# Altium PCB PCB_BTL.PcbDoc
Units mm, origin at the board's own origin, x right, y up, seen from the top; angles counter-clockwise.
Board outline 96.39 x 92.58 mm, 2 copper layers (Top Layer, Bottom Layer); 35 components, 34 nets, 92 pads, 0 vias.
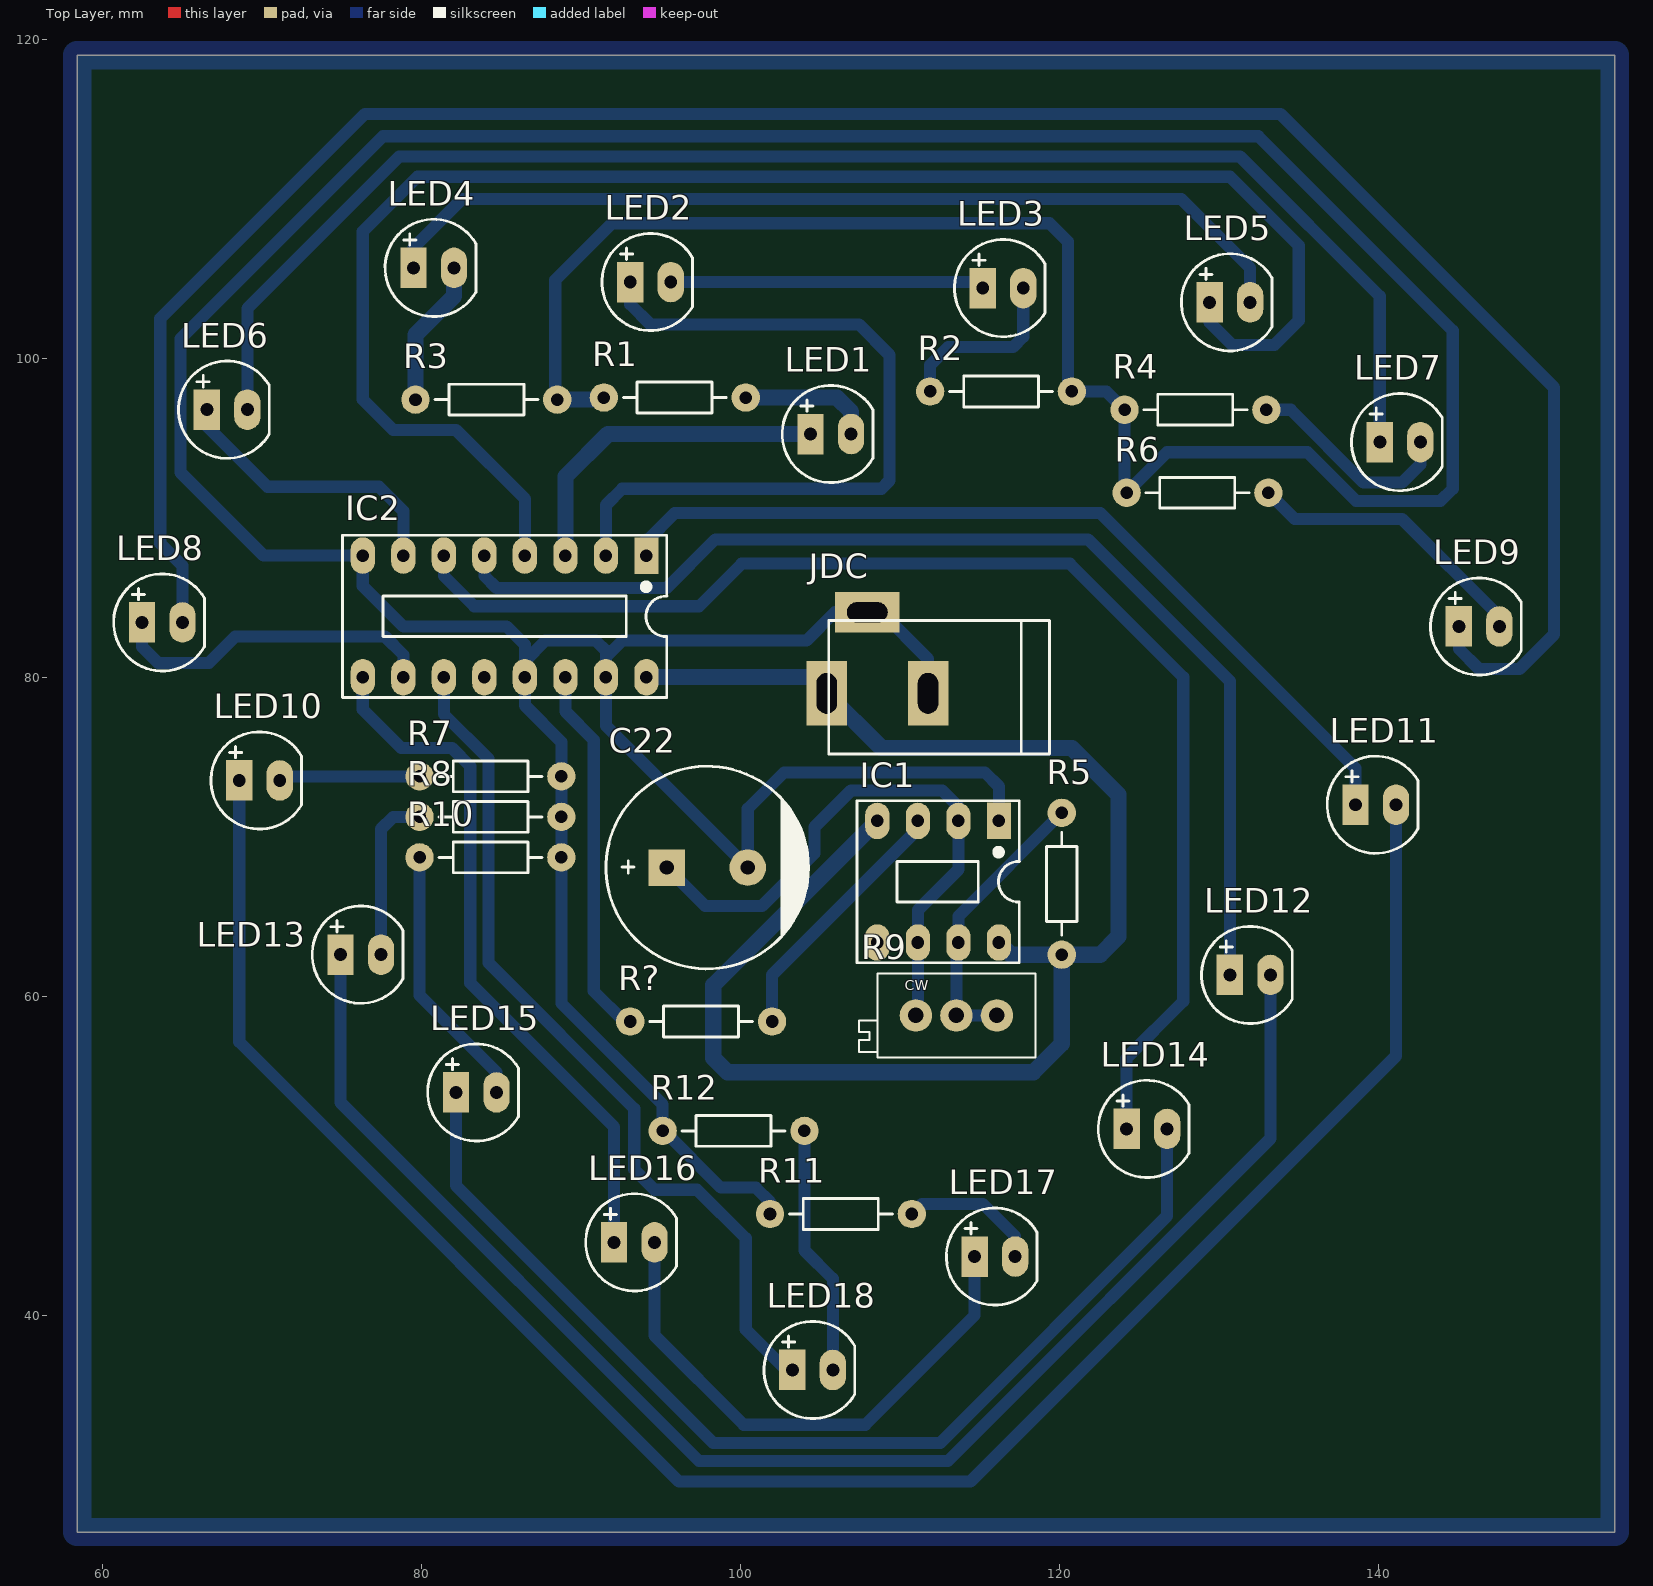
[diagram p0: Top Layer view]
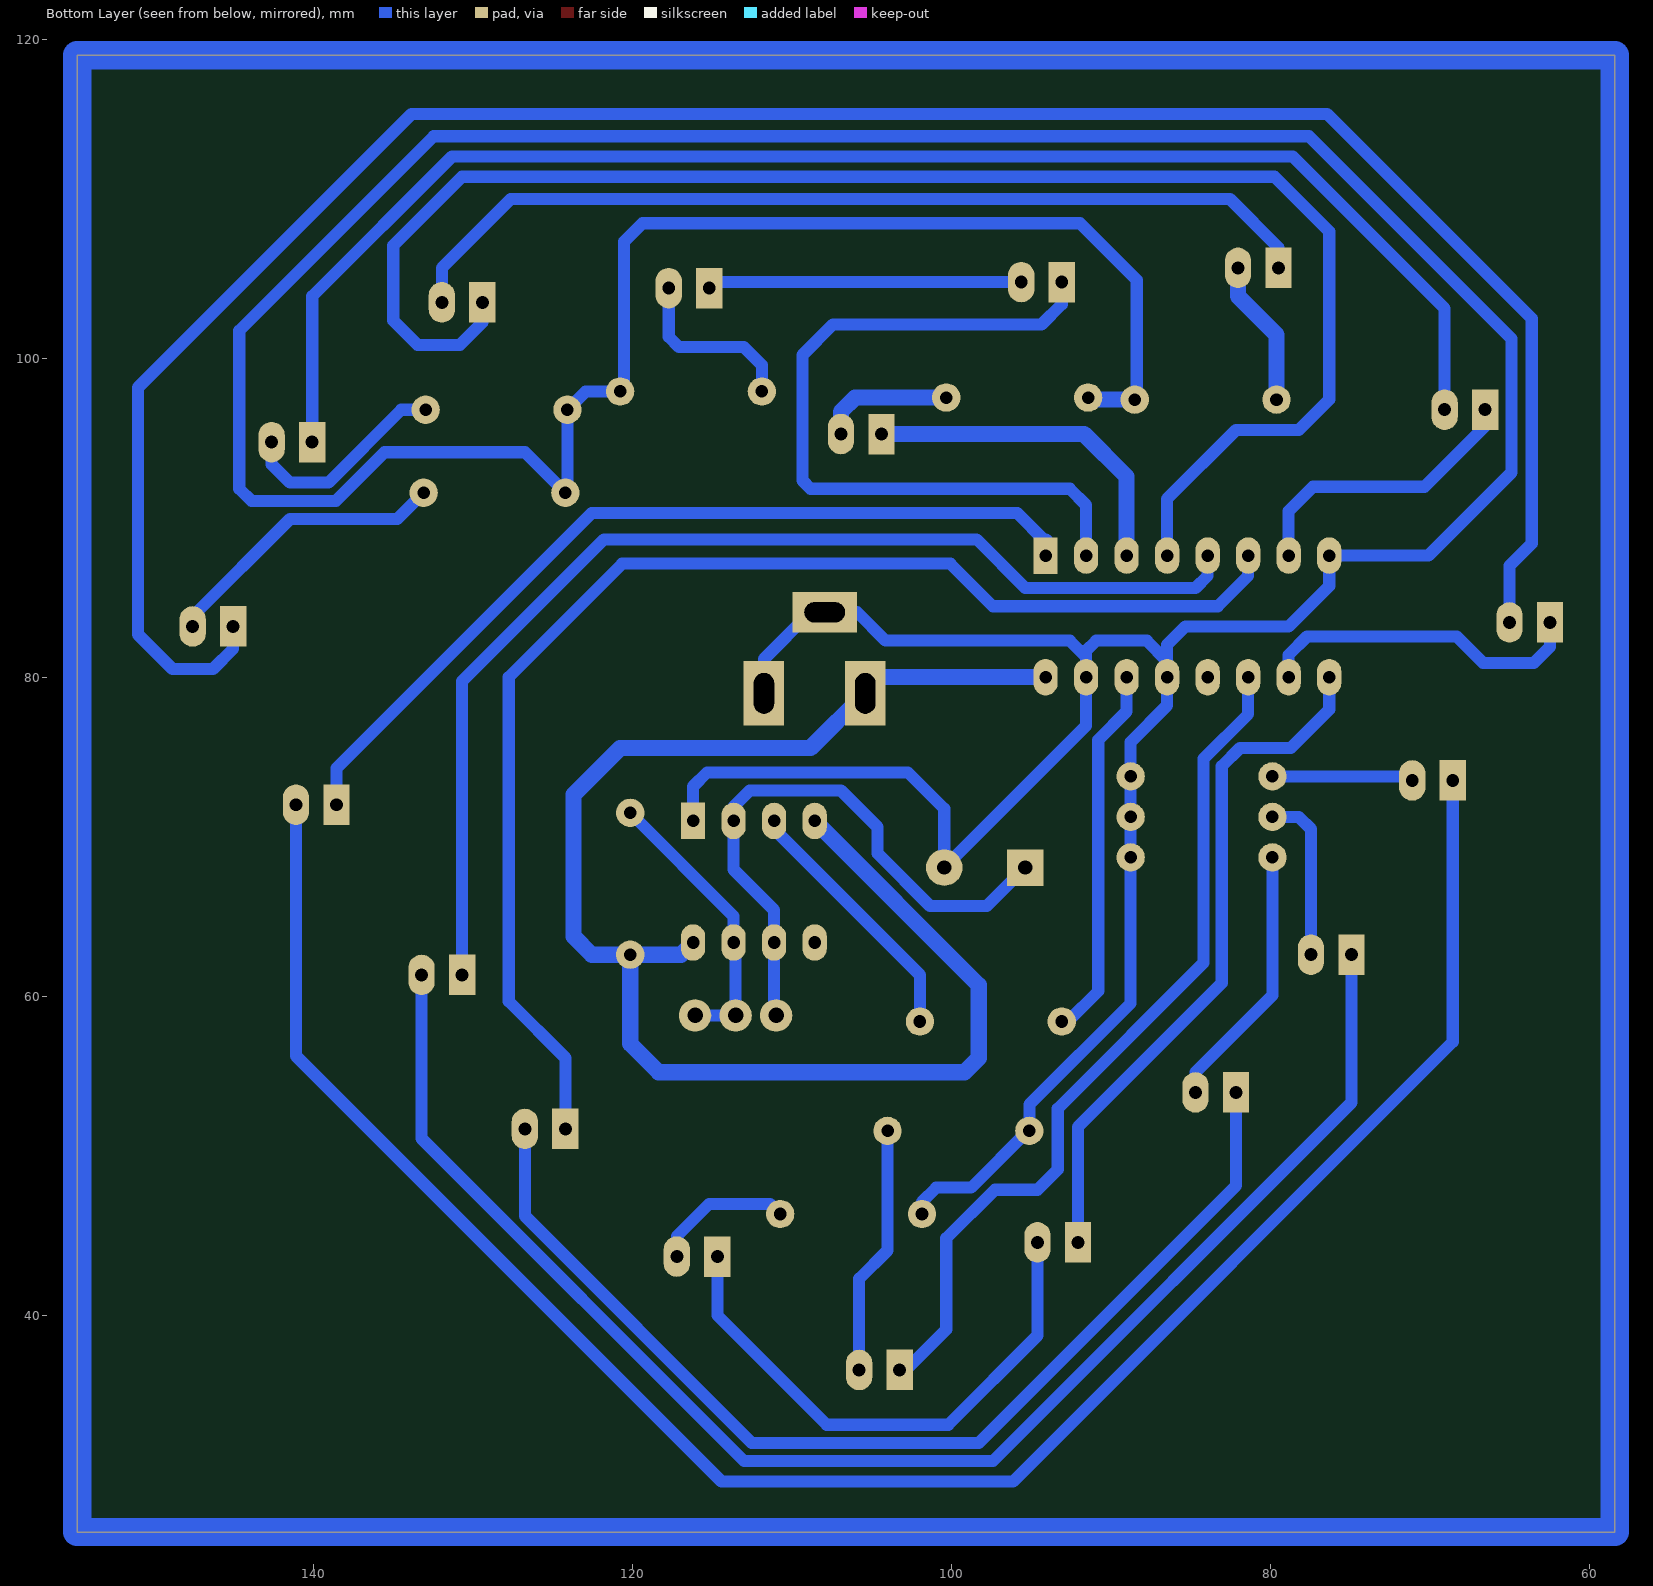
[diagram p1: Bottom Layer view, seen from below]
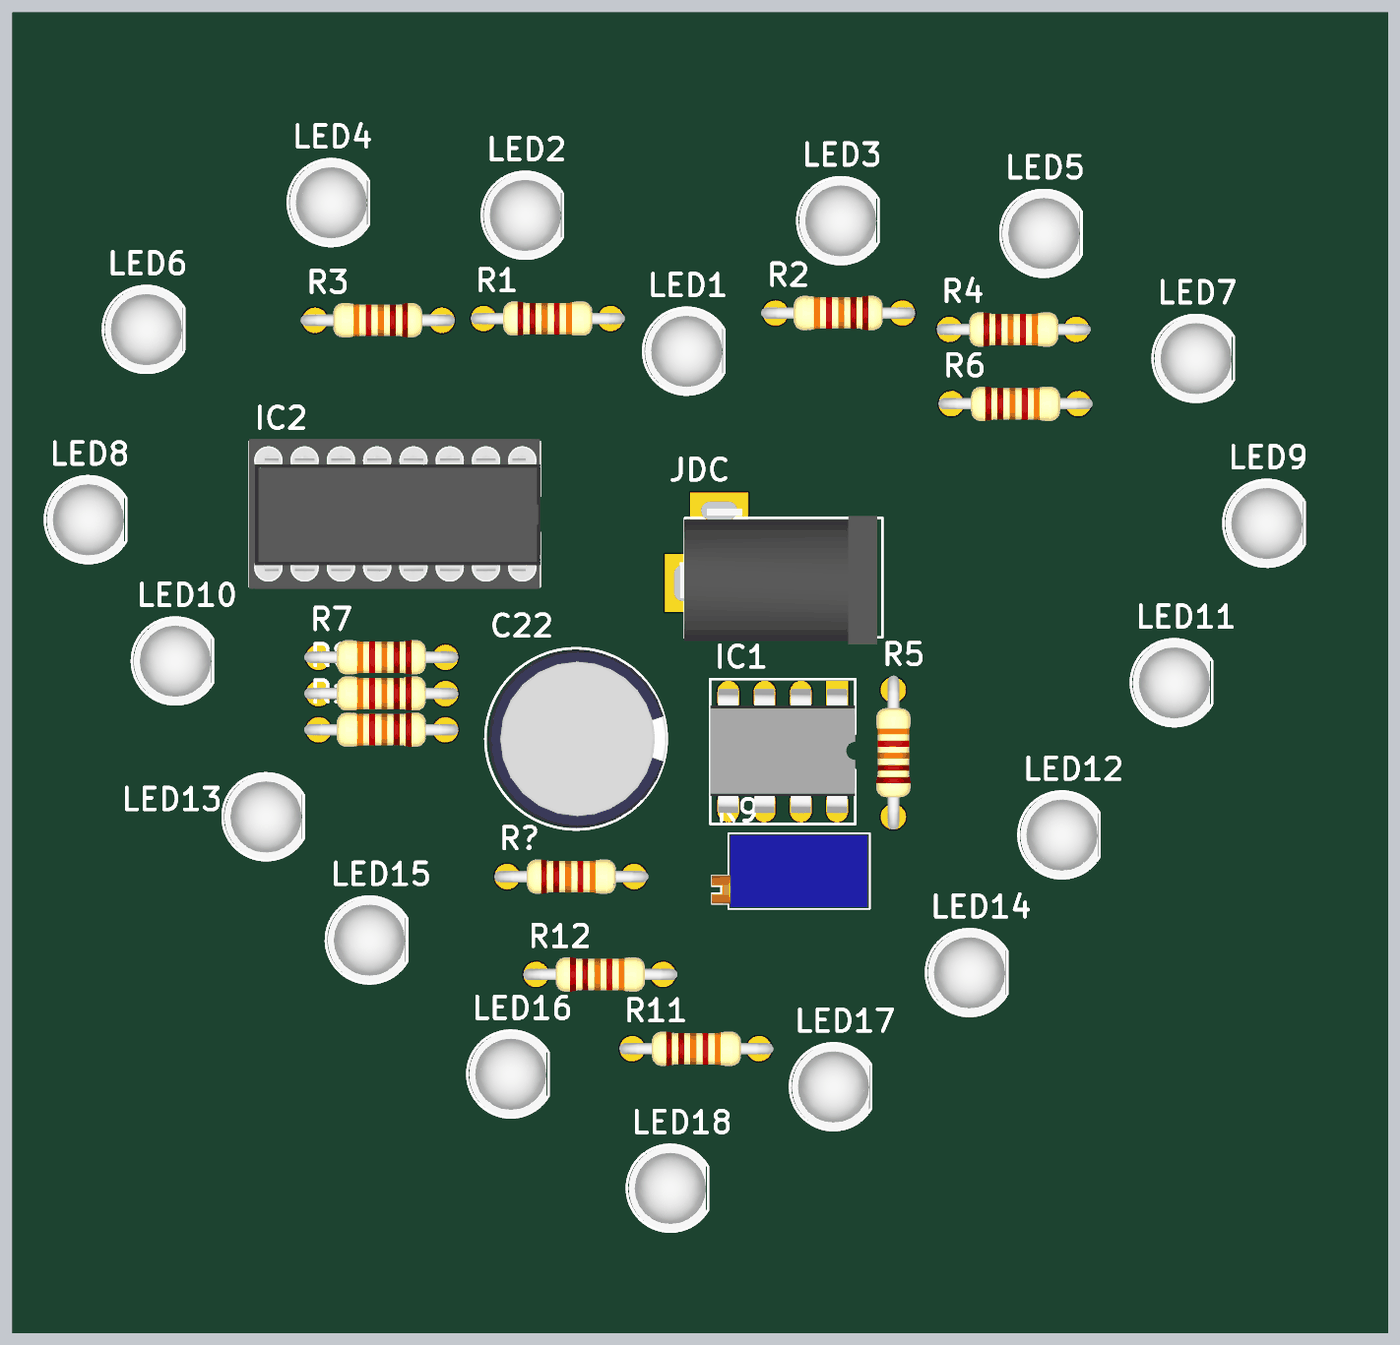
[diagram p2: 3D render of the assembled board from above, using the file's embedded part models]

## Layer stack, top to bottom
Top Solder: solder mask 0.0102, Solder Resist, Dk 3.5
Top Layer: signal copper 0.0356
Dielectric 1: dielectric 0.32, FR-4, Dk 4.8
Bottom Layer: signal copper 0.0356
Bottom Solder: solder mask 0.0102, Solder Resist, Dk 3.5

## Board outline
58.42,26.416 58.42,118.999 154.813,118.999 154.813,26.416

## Design rules (kind name [scope] priority, off if disabled: settings)
Clearance [All] p1: gap=0.508 ignorepadtopadclearanceinfootprint=FALSE
PolygonConnect [All] p1: connectstyle=Relief reliefconductorwidth=0.254 reliefentries=4 polygonreliefangle="90 Angle" airgapwidth=0.254
RoomDefinition Sch_BTL [InComponentClass('Sch_BTL')] p1: confinementstyle=ConfineIn formatcopy=TRUE lockcomponents=FALSE outline 178.943,26.924 432.308,26.924 432.308,50.292 178.943,50.292
RoutingVias [All] p1: holewidth=0.711 width=1.27 viastyle="Through Hole" minholewidth=0.711 minwidth=1.27 maxholewidth=0.711 maxwidth=1.27
SilkToSolderMaskClearance [IsPad] p1 off: minsilkscreentomaskgap=0.254 clearancetoexposedcopper=TRUE
SolderMaskExpansion [All] p1: expansion=0.102
Width [All] p1: maxlimit=2.032 minlimit=0.254 preferedwidth=0.254
29 further rules are at their usual default settings.

## Components (designator, comment, footprint, x,y, rotation, side; value= is the part's Value field where it differs from the comment)
C22 "Cap Pol3" CP2/5 95.377,68.072 r0 top value=1000pF/35V
IC1 "LM555" DIP8/W0.3 116.205,70.993 r180 top
IC2 "4017" DIP16/W0.3 94.107,87.63 r180 top value=CD4017
JDC "Jac DC" DC-IN 108.585,81.534 r180 top
LED1 "LED" LED-5-RED 104.394,95.25 r0 top value="LED 3 ly Single Colour"
LED2 "LED" LED-5-RED 93.091,104.775 r0 top value="LED 3 ly Single Colour"
LED3 "LED" LED-5-RED 115.189,104.394 r0 top value="LED 3 ly Single Colour"
LED4 "LED" LED-5-RED 79.502,105.664 r0 top value="LED 3 ly Single Colour"
LED5 "LED" LED-5-RED 129.413,103.505 r0 top value="LED 3 ly Single Colour"
LED6 "LED" LED-5-RED 66.548,96.774 r0 top value="LED 3 ly Single Colour"
LED7 "LED" LED-5-RED 140.081,94.742 r0 top value="LED 3 ly Single Colour"
LED8 "LED" LED-5-RED 62.484,83.439 r0 top value="LED 3 ly Single Colour"
LED9 "LED" LED-5-RED 145.034,83.185 r0 top value="LED 3 ly Single Colour"
LED10 "LED" LED-5-RED 68.58,73.533 r0 top value="LED 3 ly Single Colour"
LED11 "LED" LED-5-RED 138.557,72.009 r0 top value="LED 3 ly Single Colour"
LED12 "LED" LED-5-RED 130.683,61.341 r0 top value="LED 3 ly Single Colour"
LED13 "LED" LED-5-RED 74.93,62.611 r0 top value="LED 3 ly Single Colour"
LED14 "LED" LED-5-RED 124.206,51.689 r0 top value="LED 3 ly Single Colour"
LED15 "LED" LED-5-RED 82.169,53.975 r0 top value="LED 3 ly Single Colour"
LED16 "LED" LED-5-RED 92.075,44.577 r0 top value="LED 3 ly Single Colour"
LED17 "LED" LED-5-RED 114.681,43.688 r0 top value="LED 3 ly Single Colour"
LED18 "LED" LED-5-RED 103.251,36.576 r0 top value="LED 3 ly Single Colour"
R1 "900" R1/4W 100.33,97.536 r180 top value="R1/4W - 1K"
R2 "300" R1/4W 111.887,97.917 r0 top value="R1/4W - 1K"
R3 "300" R1/4W 79.629,97.409 r0 top value="R1/4W - 1K"
R4 "300" R1/4W 132.969,96.774 r180 top value="R1/4W - 1K"
R5 "1k" R1/4W 120.142,71.501 r270 top value="R1/4W - 1K"
R6 "300" R1/4W 133.096,91.567 r180 top value="R1/4W - 1K"
R7 "300" R1/4W 79.883,73.787 r0 top value="R1/4W - 1K"
R8 "300" R1/4W 79.883,71.247 r0 top value="R1/4W - 1K"
R9 "25 turns" TRIMPOT_THT_PV36X 113.538,58.801 r0 top value=5K
R10 "300" R1/4W 79.883,68.707 r0 top value="R1/4W - 1K"
R11 "300" R1/4W 110.744,46.355 r180 top value="R1/4W - 1K"
R12 "900" R1/4W 104.013,51.562 r180 top value="R1/4W - 1K"
R? "1k" R1/4W 101.981,58.42 r180 top value="R1/4W - 1K"

## Footprints (in the part's own frame and the unit in brackets; to place one, negate y for a bottom-side part, rotate by r counter-clockwise, add the part's x,y. Pads: shape width x height; smd on the part's side, far side on the other; paste and mask are expansions set on the pad)
CP2/5 [mil] "Tu hoa 1000uF/25V,50V"
  rect 90x90 hole 35: 1(0,0)
  round 90 hole 35: 2(200,0)
  silkscreen extent -150,-250 350,250, body extent -142,-246 350,246, height 984
DC-IN [mil] "Jac DC input"
  rect 100x160 hole 50 slot 100 at 90 deg: 1(125,100) 2(-125,100)
  rect 160x100 hole 50 slot 100 at 0 deg: 3(25,-100)
  silkscreen extent -425,-80 120,250, body extent -410,-105 134,269, height 434
DIP8/W0.3 [mil] "8 PIN, W 300mil, Pin to pin 100mil"
  rect 60x90 hole 31: 1(0,0)
  oval 60x90 hole 31: 2(100,0) 3(200,0) 4(300,0) 5(300,300) 6(200,300) 7(100,300) 8(0,300)
  silkscreen extent -50,-50 350,350, body extent -50,-40 350,336, height 201
DIP16/W0.3 [mil] "16 PIN, W 300mil, Pin to pin 100mil"
  rect 60x90 hole 31: 1(0,0)
  oval 60x90 hole 31: 2(100,0) 3(200,0) 4(300,0) 5(400,0) 6(500,0) 7(600,0) 8(700,0) 9(700,300) 10(600,300) 11(500,300) 12(400,300) 13(300,300) 14(200,300) 15(100,300) 16(0,300)
  silkscreen extent -50,-50 750,350, body extent -52,-57 752,356, height 299
LED-5-RED [mil] "LED 2 PIN, 5 ly , Only colour,pin to pin 100mil"
  rect 65x100 hole 32: 1(0,0)
  oval 65x100 hole 32: 2(100,0)
  silkscreen extent -70,-120 154,120, body extent -65,-119 149,118, height 339
R1/4W [mil] "R 1/4W, 2 Pin, 350mil"
  round 70 hole 31: 1(0,0) 2(350,0)
  silkscreen extent 48,-38 302,38, body extent -40,-47 386,47, height 111
TRIMPOT_THT_PV36X [mil] "TRIMMER, MURATA, PV36X"
  round 80 hole 38: CCW(100,0) CW(-100,0) W(0,0)
  silkscreen extent -240,-104 195,104, body extent -240,-98 189,98, height 394

## Part data
C22: "Polarized Capacitor (Surface Mount)", LatestRevisionDate=17-Jul-2002, LatestRevisionNote="Re-released for DXP Platform.", PackageReference=C0805, Publisher="Altium Limited"
IC1: "Timer"
IC2: "Decade Counter/Divider with 10 Decoded Outputs", Designed by=VanDungEvn
JDC: library part DCIN, "Jac DC input"
LED1 LED2 LED3 LED4 LED5 LED6 LED7 LED8 LED9 LED10 LED11 LED12 LED13 LED14 LED15 LED16 LED17 LED18: "LED Single colour Green and Red"
R1 R2 R3 R4 R5 R6 R7 R8 R10 R11 R12 R?: library part R1/4W, "Resistor 1/4W"
R9: library part RES_TRIMMER_10K_25T_THT, "Trimmer THD 10K 500mW 25-turn", Manufacturer 1="Murata Electronics North America", Manufacturer Part Number 1=PV36X103C01B00, Package / Case="10.9mm L x 5.0mm W x 10.0mm H", Ratings="1/2W; ±100ppm/°C", Supplier Part Number 1=490-2894-ND, Tolerance=±10%, Material=Cermet, SCDType=spec, Supplier 1=Digi-Key

## Nets (pads, with @x,y where several pads share a name; then routed paths per layer and width w, separated by ;. In a path a pad name is that pad's centre, name@x,y a point inside that pad or via, vN(x,y) a via of type N, cw(c..) or ccw(c..) an arc to the next point about the centre after c; other vN are vias at no path point)
NetC22_1: C22.1 IC1.2 IC1.6 R9.CW | length 37.9
  Bottom Layer w0.762: C22.1 97.79,65.659 101.346,65.659 104.648,68.961 104.648,70.612 106.934,72.898 112.649,72.898 113.665,71.882 IC1.2 113.665,67.945 111.125,65.405 IC1.6 111.125,58.928 R9.CW
NetC22_2: C22.2 IC1.1 IC2.8 IC2.13 IC2.15 JDC.2 JDC.3 R1.2 R2.2 R3.2 R4.2 R6.2 R7.2 R8.2 R10.2 R11.2 R12.2 | length 336.2
  Bottom Layer w0.762: R3.2 88.392,97.536 88.392,104.902 91.948,108.458 119.38,108.458 120.523,107.315 120.523,98.171 R2.2 122.936,97.917 R4.2 124.079,91.694 R6.2 126.746,94.107 135.544,94.107 138.592,91.059 143.891,91.059 144.653,91.821 144.653,101.727 132.461,113.919 77.597,113.919 64.897,101.219 64.897,92.837 70.104,87.63 IC2.8 76.327,85.725 78.867,83.185 85.344,83.185 86.487,82.042 IC2.13@86.487,81.026 ; R11.2 101.854,47.117 100.965,48.006 98.771,48.006 95.215,51.562 R12.2 95.123,53.213 88.773,59.563 R10.2 R8.2 R7.2 88.773,75.946 86.487,78.232 IC2.13 IC2.13@86.487,81.026 ; JDC.2@111.76,78.74 JDC.2 111.76,81.153 108.839,84.074 JDC.3 105.918,84.074 104.14,82.296 92.583,82.296 91.567,81.28 ; IC1.1 116.205,73.152 115.316,74.041 102.743,74.041 100.457,71.755 C22.2 91.567,76.962 IC2.15 91.567,81.28 ; IC2.13@86.487,81.026 87.757,82.296 90.932,82.296 91.567,81.661 91.567,81.28
  Bottom Layer w1.016: R3.2 91.313,97.409 R1.2
NetIC1_3: IC1.3 R?.1 | length 16.4
  Bottom Layer w0.762: R?.1 101.981,61.341 111.125,70.485 IC1.3
NetIC1_4: IC1.4 IC1.8 IC2.16 JDC.1 R5.2 | length 97.5
  Bottom Layer w0.762: JDC.1@104.394,80.01 JDC.1
  Bottom Layer w1.016: IC2.16 JDC.1@104.394,80.01 ; JDC.1 108.839,75.565 120.777,75.565 123.698,72.644 123.698,63.754 122.555,62.611 R5.2 ; IC1.4 98.298,60.706 98.298,56.134 99.187,55.245 118.364,55.245 120.142,57.023 R5.2 ; IC1.8 116.967,62.611 R5.2
NetIC1_7: IC1.7 R5.1 R9.CCW R9.W | length 18
  Bottom Layer w0.762: R9.CCW R9.W 113.538,63.246 IC1.7 113.665,65.024 R5.1
NetIC2_1: IC2.1 LED11.1 | length 55
  Bottom Layer w0.762: IC2.1@94.107,88.519 95.885,90.297 122.555,90.297 138.557,74.295 LED11.1
  Bottom Layer w1.016: IC2.1 IC2.1@94.107,88.519
NetIC2_2: IC2.2 LED2.1 | length 49.4
  Bottom Layer w0.762: IC2.2 91.567,90.805 92.583,91.821 108.839,91.821 109.347,92.329 109.347,100.203 107.442,102.108 94.361,102.108 93.091,103.378 LED2.1
  Bottom Layer w1.016: IC2.2 IC2.2@91.694,87.503 ; LED2.1 LED2.1@93.091,105.537
NetIC2_3: IC2.3 LED1.1 | length 21.4
  Bottom Layer w1.016: IC2.3 89.027,92.583 91.694,95.25 LED1.1
NetIC2_4: IC2.4 LED5.1 | length 101.5
  Bottom Layer w0.762: IC2.4 86.487,91.186 82.169,95.504 78.232,95.504 76.327,97.409 76.327,107.95 79.756,111.379 130.683,111.379 135.001,107.061 135.001,102.362 133.477,100.838 130.81,100.838 129.413,102.235 LED5.1
NetIC2_5: IC2.5 LED12.1 | length 71.7
  Bottom Layer w0.762: IC2.5 83.947,86.36 84.709,85.598 95.377,85.598 98.425,88.646 121.793,88.646 130.683,79.756 LED12.1
NetIC2_6: IC2.6 LED14.1 | length 82.3
  Bottom Layer w0.762: IC2.6 81.407,86.36 83.312,84.455 97.409,84.455 100.076,87.122 120.65,87.122 127.762,80.01 127.762,59.69 124.206,56.134 LED14.1
NetIC2_7: IC2.7 LED6.1 | length 18.3
  Bottom Layer w0.762: LED6.1 66.548,95.758 70.358,91.948 77.343,91.948 78.867,90.424 IC2.7
NetIC2_9: IC2.9 LED16.1 | length 43.8
  Bottom Layer w0.762: IC2.9 76.327,77.978 78.74,75.565 81.915,75.565 83.058,74.422 83.058,60.833 92.075,51.816 LED16.1
NetIC2_10: IC2.10 LED8.1 | length 20.9
  Bottom Layer w0.762: LED8.1 62.484,81.915 63.5,80.899 66.675,80.899 68.326,82.55 77.724,82.55 78.867,81.407 IC2.10
NetIC2_11: IC2.11 LED18.1 | length 54.3
  Bottom Layer w0.762: IC2.11 81.407,77.689 84.201,74.895 84.201,62.103 93.345,52.959 93.345,49.149 94.615,47.879 97.282,47.879 100.33,44.831 100.33,39.116 102.87,36.576 LED18.1
NetIC2_14: IC2.14 R?.2 | length 23.5
  Bottom Layer w0.762: IC2.14 89.027,77.851 90.805,76.073 90.805,60.325 92.71,58.42 R?.2
NetLED1_2: LED1.2 R1.1 | length 8.4
  Bottom Layer w1.016: R1.1 106.045,97.536 106.934,96.647 LED1.2
NetLED2_2: LED2.2 LED3.1 | length 19.7
  Bottom Layer w0.762: LED2.2 114.808,104.775 LED3.1
NetLED3_2: LED3.2 R2.1 | length 11.3
  Bottom Layer w0.762: R2.1 111.887,99.568 113.03,100.711 117.094,100.711 117.729,101.346 LED3.2
NetLED4_1: LED4.1 LED5.2 | length 58.9
  Bottom Layer w0.762: LED4.1 79.502,106.934 82.55,109.982 127.635,109.982 131.953,105.664 LED5.2
NetLED4_2: LED4.2 R3.1 | length 9.3
  Bottom Layer w1.016: R3.1 79.629,101.473 82.042,103.886 LED4.2
NetLED6_2: LED6.2 LED7.1 | length 94.1
  Bottom Layer w0.762: LED6.2 69.088,103.124 78.613,112.649 131.318,112.649 140.081,103.886 LED7.1
NetLED7_2: LED7.2 R4.1 | length 13.4
  Bottom Layer w0.762: R4.1 134.493,96.774 139.065,92.202 141.478,92.202 142.621,93.345 LED7.2
NetLED8_2: LED8.2 LED9.1 | length 143.7
  Bottom Layer w0.762: LED8.2 65.024,86.995 63.627,88.392 63.627,102.489 76.454,115.316 133.858,115.316 151.003,98.171 151.003,82.677 148.844,80.518 146.304,80.518 145.034,81.788 LED9.1
NetLED9_2: LED9.2 R6.1 | length 18.3
  Bottom Layer w0.762: R6.1 134.747,89.916 141.478,89.916 147.574,83.82 LED9.2
NetLED10_1: LED10.1 LED11.2 | length 127.1
  Bottom Layer w0.762: LED10.1 68.58,57.15 96.139,29.591 114.427,29.591 141.097,56.261 LED11.2
NetLED10_2: LED10.2 R7.1 | length 8.9
  Bottom Layer w0.762: LED10.2 71.374,73.787 R7.1
NetLED12_2: LED12.2 LED13.1 | length 95.5
  Bottom Layer w0.762: LED13.1 74.93,53.34 97.409,30.861 112.995,30.861 133.223,51.089 LED12.2
NetLED13_2: LED13.2 R8.1 | length 10.6
  Bottom Layer w0.762: LED13.2 77.47,70.485 78.232,71.247 R8.1
NetLED14_2: LED14.2 LED15.1 | length 68.5
  Bottom Layer w0.762: LED15.1 82.169,48.133 98.298,32.004 112.522,32.004 126.746,46.228 LED14.2
NetLED15_2: LED15.2 R10.1 | length 16.7
  Bottom Layer w0.762: R10.1 79.883,60.071 84.709,55.245 LED15.2
NetLED16_2: LED16.2 LED17.1 | length 34.7
  Bottom Layer w0.762: LED16.2 94.615,38.735 100.203,33.147 107.823,33.147 114.681,40.005 LED17.1
NetLED17_2: LED17.2 R11.1 | length 8.9
  Bottom Layer w0.762: R11.1 111.379,46.99 115.189,46.99 117.221,44.958 LED17.2
NetLED18_2: LED18.2 R12.1 | length 15.7
  Bottom Layer w0.762: R12.1 104.013,44.069 105.791,42.291 LED18.2
pads on no net: IC1.5 IC2.12
copper on no net: | length 378
  Bottom Layer w1.778: 58.42,26.416 154.813,26.416 154.813,118.999 58.42,118.999 58.42,26.416

## Polygon pours and split planes (outlines as drawn)
no net on Bottom Layer "Bottom Layer-No Net 1" (solid, pour order 0): 58.039,118.999

## Text inside footprints (layer, text, board x,y; h text height)
R9: Top Overlay "CW" at 110.298,60.368 h0.64